# Altium PCB Updated_PCB1.pcbdoc
Units mm, origin at the board's own origin, x right, y up, seen from the top; angles counter-clockwise.
Board outline 114.3 x 96.01 mm, 2 copper layers (Top Layer, Bottom Layer); 136 components, 39 nets, 392 pads, 88 vias.
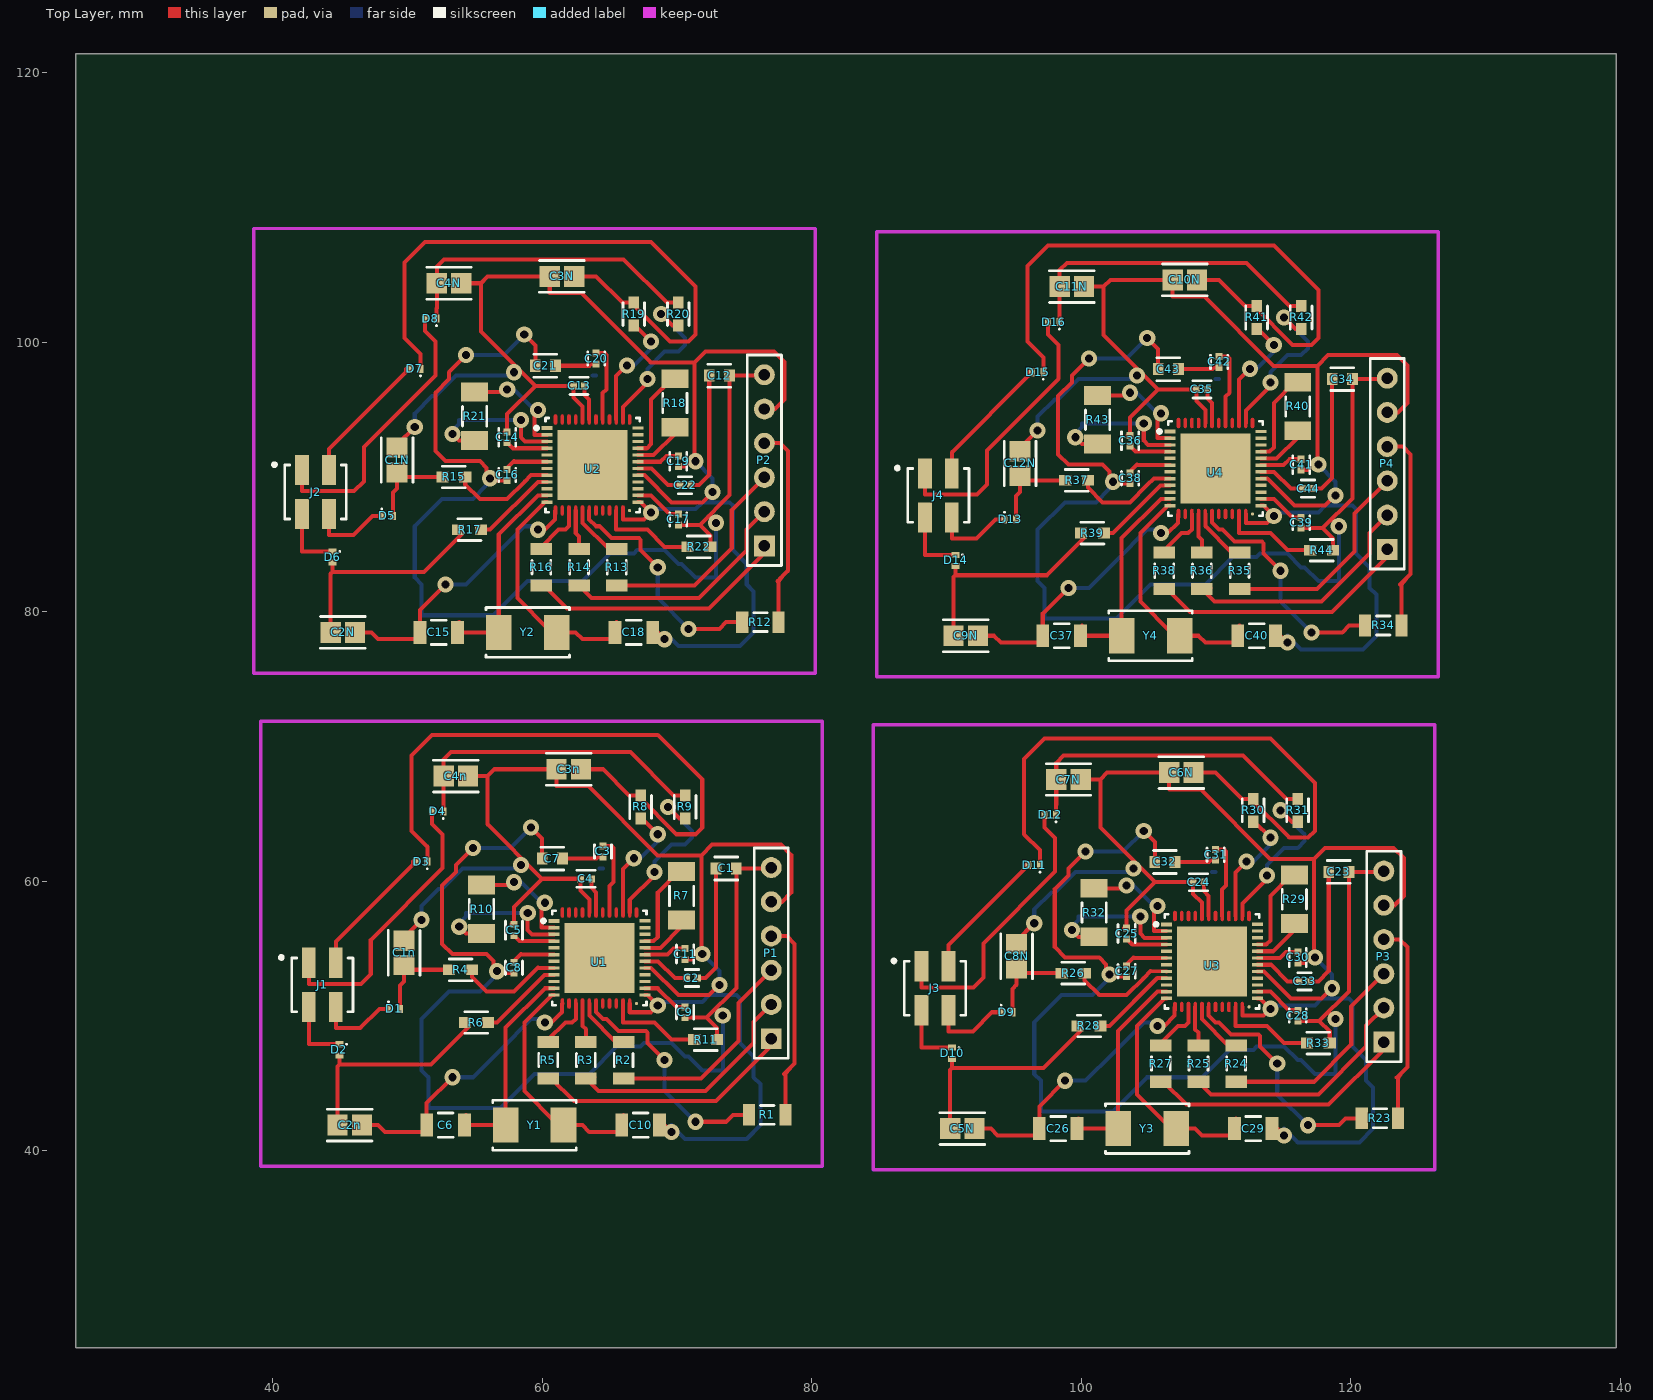
[diagram p0: Top Layer view]
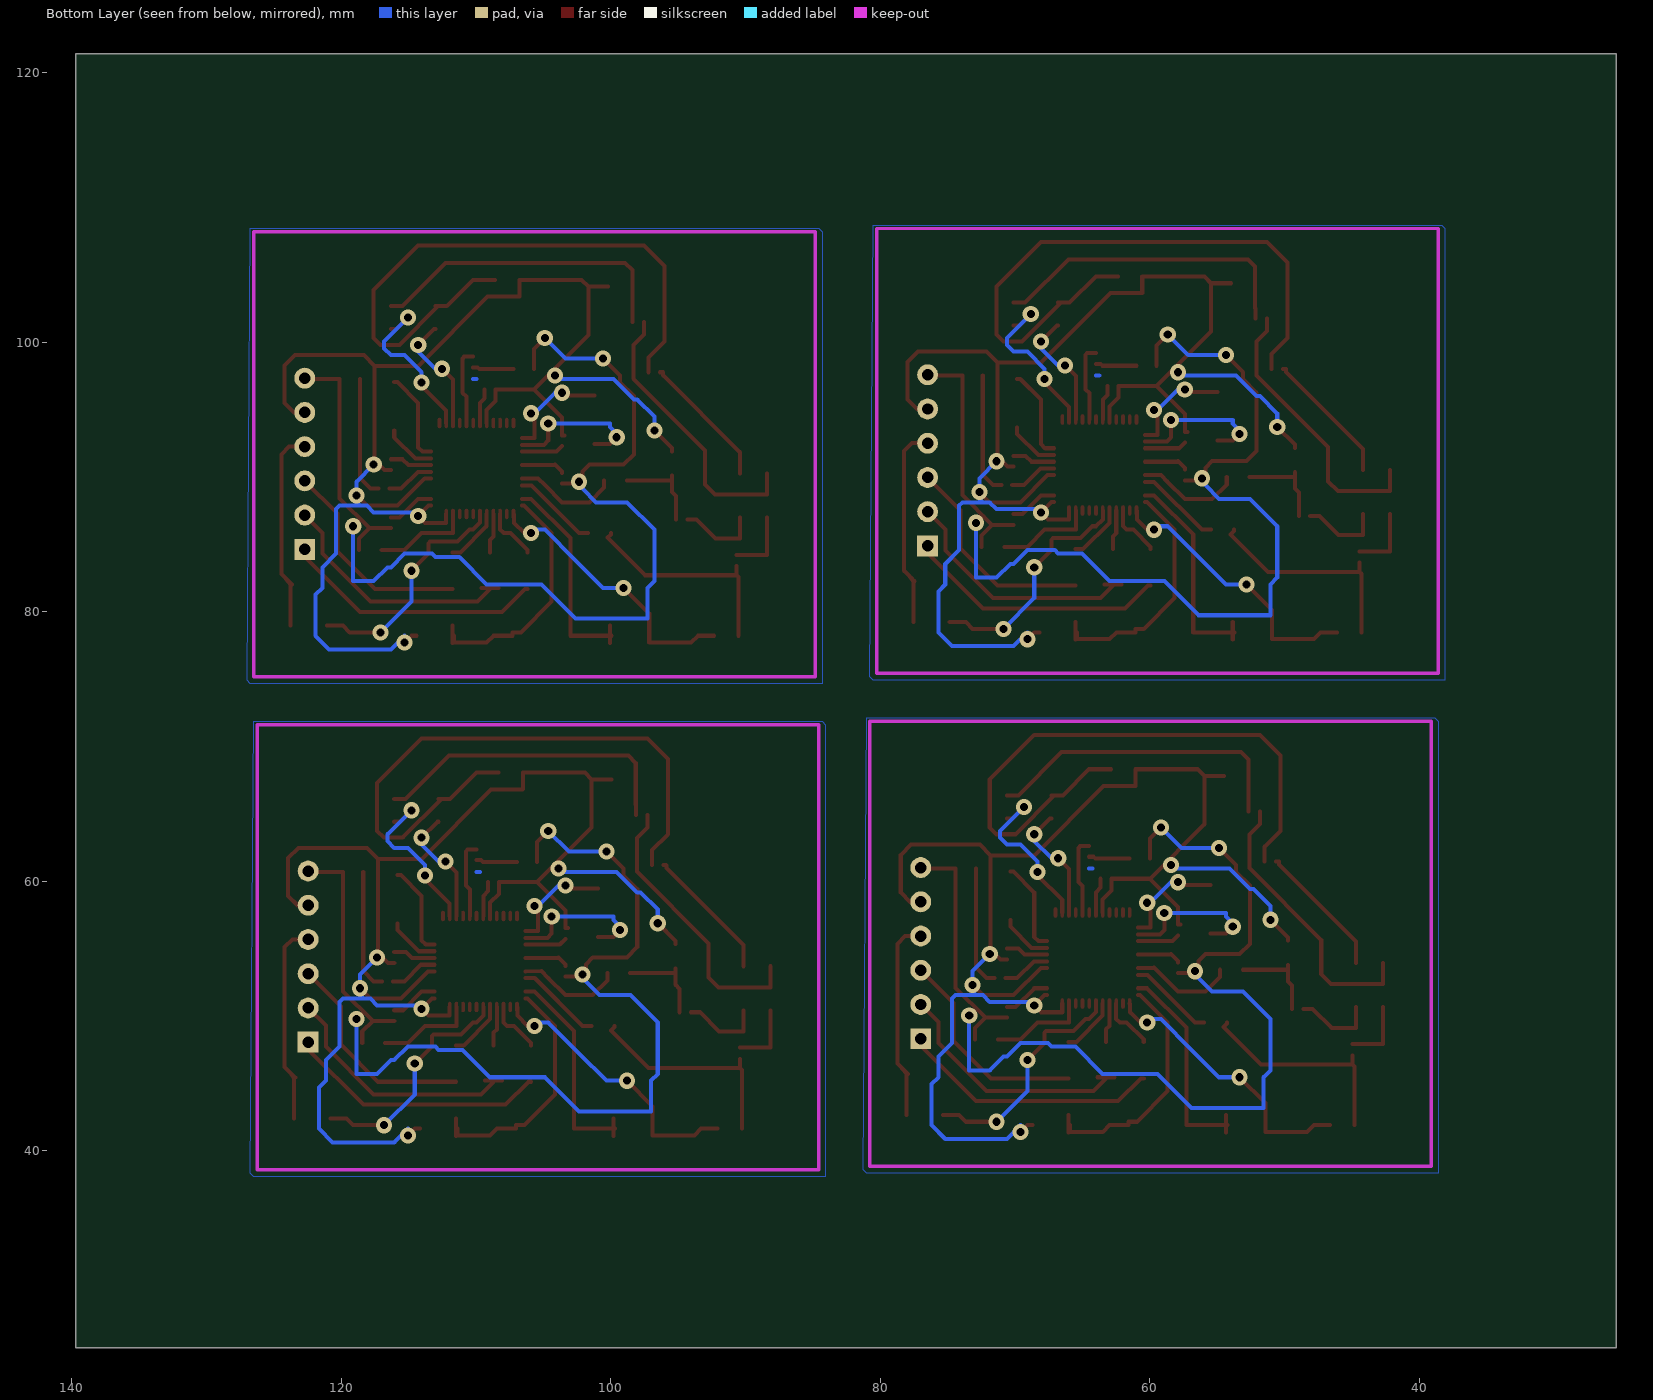
[diagram p1: Bottom Layer view, seen from below]

## Layer stack, top to bottom
Top Layer: signal copper (thickness not stored)
Dielectric: dielectric 0.32, FR-4, Dk 4.8
Bottom Layer: signal copper (thickness not stored)

## Board outline
139.7,25.4 25.4,25.4 25.4,121.412 139.7,121.412

## Components (designator, comment, footprint, x,y, rotation, side; value= is the part's Value field where it differs from the comment)
C1 "10uF" FP-CC0603-DB-MFG 73.66,60.96 r180 top
C1N "1nF" FP-0805-L_2_01_0_2-W_1_25-IPC_A 49.242,91.272 r90 top
C1n "1nF" FP-0805-L_2_01_0_2-W_1_25-IPC_A 49.75,54.696 r90 top
C2 ".1uF" FP-C0402-BB-MFG 71.12,52.832 r180 top
C2N "1nF" FP-0805-L_2_01_0_2-W_1_25-IPC_A 45.212,78.486 r0 top
C2n "1nF" FP-0805-L_2_01_0_2-W_1_25-IPC_A 45.72,41.91 r0 top
C3 ".1uF" FP-C0402-BB-MFG 64.516,62.23 r90 top
C3N "1nF" FP-0805-L_2_01_0_2-W_1_25-IPC_A 61.468,104.902 r180 top
C3n "1nF" FP-0805-L_2_01_0_2-W_1_25-IPC_A 61.976,68.326 r180 top
C4 "1uF" FP-C0402C105K8PACTU-MFG 63.246,60.198 r180 top
C4N "1nF" FP-0805-L_2_01_0_2-W_1_25-IPC_A 53.086,104.394 r0 top
C4n "1nF" FP-0805-L_2_01_0_2-W_1_25-IPC_A 53.594,67.818 r0 top
C5 "1uF" FP-C0402C105K8PACTU-MFG 57.912,56.388 r90 top
C5N "1nF" FP-0805-L_2_01_0_2-W_1_25-IPC_A 91.186,41.656 r0 top
C6 "22pF" FP-C1206C-EB-MFG 52.832,41.91 r180 top
C6N "1nF" FP-0805-L_2_01_0_2-W_1_25-IPC_A 107.442,68.072 r180 top
C7 "10uF" FP-CC0603-DB-MFG 60.75,61.696 r0 top
C7N "1nF" FP-0805-L_2_01_0_2-W_1_25-IPC_A 99.06,67.564 r0 top
C8 ".1uF" FP-C0402-BB-MFG 57.912,53.594 r90 top
C8N "1nF" FP-0805-L_2_01_0_2-W_1_25-IPC_A 95.216,54.442 r90 top
C9 ".1uF" FP-C0402-BB-MFG 70.612,50.292 r90 top
C9N "1nF" FP-0805-L_2_01_0_2-W_1_25-IPC_A 91.44,78.232 r0 top
C10 "22pF" FP-C1206C-EB-MFG 67.31,41.91 r0 top
C10N "1nF" FP-0805-L_2_01_0_2-W_1_25-IPC_A 107.696,104.648 r180 top
C11 "1uF" FP-C0402C105K8PACTU-MFG 70.612,54.61 r90 top
C11N "1nF" FP-0805-L_2_01_0_2-W_1_25-IPC_A 99.314,104.14 r0 top
C12 "10uF" FP-CC0603-DB-MFG 73.152,97.536 r180 top
C12N "1nF" FP-0805-L_2_01_0_2-W_1_25-IPC_A 95.47,91.018 r90 top
C13 "1uF" FP-C0402C105K8PACTU-MFG 62.738,96.774 r180 top
C14 "1uF" FP-C0402C105K8PACTU-MFG 57.404,92.964 r90 top
C15 "22pF" FP-C1206C-EB-MFG 52.324,78.486 r180 top
C16 ".1uF" FP-C0402-BB-MFG 57.404,90.17 r90 top
C17 ".1uF" FP-C0402-BB-MFG 70.104,86.868 r90 top
C18 "22pF" FP-C1206C-EB-MFG 66.802,78.486 r0 top
C19 "1uF" FP-C0402C105K8PACTU-MFG 70.104,91.186 r90 top
C20 ".1uF" FP-C0402-BB-MFG 64.008,98.806 r90 top
C21 "10uF" FP-CC0603-DB-MFG 60.242,98.272 r0 top
C22 ".1uF" FP-C0402-BB-MFG 70.612,89.408 r180 top
C23 "10uF" FP-CC0603-DB-MFG 119.126,60.706 r180 top
C24 "1uF" FP-C0402C105K8PACTU-MFG 108.712,59.944 r180 top
C25 "1uF" FP-C0402C105K8PACTU-MFG 103.378,56.134 r90 top
C26 "22pF" FP-C1206C-EB-MFG 98.298,41.656 r180 top
C27 ".1uF" FP-C0402-BB-MFG 103.378,53.34 r90 top
C28 ".1uF" FP-C0402-BB-MFG 116.078,50.038 r90 top
C29 "22pF" FP-C1206C-EB-MFG 112.776,41.656 r0 top
C30 "1uF" FP-C0402C105K8PACTU-MFG 116.078,54.356 r90 top
C31 ".1uF" FP-C0402-BB-MFG 109.982,61.976 r90 top
C32 "10uF" FP-CC0603-DB-MFG 106.216,61.442 r0 top
C33 ".1uF" FP-C0402-BB-MFG 116.586,52.578 r180 top
C34 "10uF" FP-CC0603-DB-MFG 119.38,97.282 r180 top
C35 "1uF" FP-C0402C105K8PACTU-MFG 108.966,96.52 r180 top
C36 "1uF" FP-C0402C105K8PACTU-MFG 103.632,92.71 r90 top
C37 "22pF" FP-C1206C-EB-MFG 98.552,78.232 r180 top
C38 ".1uF" FP-C0402-BB-MFG 103.632,89.916 r90 top
C39 ".1uF" FP-C0402-BB-MFG 116.332,86.614 r90 top
C40 "22pF" FP-C1206C-EB-MFG 113.03,78.232 r0 top
C41 "1uF" FP-C0402C105K8PACTU-MFG 116.332,90.932 r90 top
C42 ".1uF" FP-C0402-BB-MFG 110.236,98.552 r90 top
C43 "10uF" FP-CC0603-DB-MFG 106.47,98.018 r0 top
C44 ".1uF" FP-C0402-BB-MFG 116.84,89.154 r180 top
D1 "TVS Diode" ONSC-SOD-923-2-514AB-01_V 49.022,50.546 r0 top
D2 "TVS Diode" ONSC-SOD-923-2-514AB-01_V 44.958,47.498 r270 top
D3 "TVS Diode" ONSC-SOD-923-2-514AB-01_V 51.054,61.468 r180 top
D4 "TVS Diode" ONSC-SOD-923-2-514AB-01_V 52.25,65.196 r180 top
D5 "TVS Diode" ONSC-SOD-923-2-514AB-01_V 48.514,87.122 r0 top
D6 "TVS Diode" ONSC-SOD-923-2-514AB-01_V 44.45,84.074 r270 top
D7 "TVS Diode" ONSC-SOD-923-2-514AB-01_V 50.546,98.044 r180 top
D8 "TVS Diode" ONSC-SOD-923-2-514AB-01_V 51.742,101.772 r180 top
D9 "TVS Diode" ONSC-SOD-923-2-514AB-01_V 94.488,50.292 r0 top
D10 "TVS Diode" ONSC-SOD-923-2-514AB-01_V 90.424,47.244 r270 top
D11 "TVS Diode" ONSC-SOD-923-2-514AB-01_V 96.52,61.214 r180 top
D12 "TVS Diode" ONSC-SOD-923-2-514AB-01_V 97.716,64.942 r180 top
D13 "TVS Diode" ONSC-SOD-923-2-514AB-01_V 94.742,86.868 r0 top
D14 "TVS Diode" ONSC-SOD-923-2-514AB-01_V 90.678,83.82 r270 top
D15 "TVS Diode" ONSC-SOD-923-2-514AB-01_V 96.774,97.79 r180 top
D16 "TVS Diode" ONSC-SOD-923-2-514AB-01_V 97.97,101.518 r180 top
J1 "SQW-102-01-F-D-VS" SMTC-SQW-102-01-X-D-VS 43.688,52.324 r0 top
J2 "SQW-102-01-F-D-VS" SMTC-SQW-102-01-X-D-VS 43.18,88.9 r0 top
J3 "SQW-102-01-F-D-VS" SMTC-SQW-102-01-X-D-VS 89.154,52.07 r0 top
J4 "SQW-102-01-F-D-VS" SMTC-SQW-102-01-X-D-VS 89.408,88.646 r0 top
P1 "TSW-106-07-L-S" SMTC-TSW-106-07-X-S 77,48.326 r90 top
P2 "TSW-106-07-L-S" SMTC-TSW-106-07-X-S 76.492,84.902 r90 top
P3 "TSW-106-07-L-S" SMTC-TSW-106-07-X-S 122.466,48.072 r90 top
P4 "TSW-106-07-L-S" SMTC-TSW-106-07-X-S 122.72,84.648 r90 top
R1 "22Ω" RESC3216X60X45LL10T20 76.708,42.672 r0 top
R2 "22Ω" RESC3216X60X45LL10T20 66.04,46.736 r270 top
R3 "22Ω" RESC3216X60X45LL10T20 63.246,46.736 r270 top
R4 "10kΩ" FP-RT0603-MFG 53.949,53.446 r0 top
R5 "22Ω" RESC3216X60X45LL10T20 60.452,46.736 r270 top
R6 "10kΩ" FP-RT0603-MFG 55.118,49.53 r0 top
R7 "1kΩ" FP-RG3216-MFG 70.358,58.928 r270 top
R8 "10kΩ" FP-RT0603-MFG 67.31,65.532 r270 top
R9 "10kΩ" FP-RT0603-MFG 70.612,65.532 r270 top
R10 "1kΩ" FP-RG3216-MFG 55.5,57.946 r270 top
R11 "10kΩ" FP-RT0603-MFG 72.136,48.26 r0 top
R12 "22Ω" RESC3216X60X45LL10T20 76.2,79.248 r0 top
R13 "22Ω" RESC3216X60X45LL10T20 65.532,83.312 r270 top
R14 "22Ω" RESC3216X60X45LL10T20 62.738,83.312 r270 top
R15 "10kΩ" FP-RT0603-MFG 53.441,90.022 r0 top
R16 "22Ω" RESC3216X60X45LL10T20 59.944,83.312 r270 top
R17 "10kΩ" FP-RT0603-MFG 54.61,86.106 r0 top
R18 "1kΩ" FP-RG3216-MFG 69.85,95.504 r270 top
R19 "10kΩ" FP-RT0603-MFG 66.802,102.108 r270 top
R20 "10kΩ" FP-RT0603-MFG 70.104,102.108 r270 top
R21 "1kΩ" FP-RG3216-MFG 54.992,94.522 r270 top
R22 "10kΩ" FP-RT0603-MFG 71.628,84.836 r0 top
R23 "22Ω" RESC3216X60X45LL10T20 122.174,42.418 r0 top
R24 "22Ω" RESC3216X60X45LL10T20 111.506,46.482 r270 top
R25 "22Ω" RESC3216X60X45LL10T20 108.712,46.482 r270 top
R26 "10kΩ" FP-RT0603-MFG 99.415,53.192 r0 top
R27 "22Ω" RESC3216X60X45LL10T20 105.918,46.482 r270 top
R28 "10kΩ" FP-RT0603-MFG 100.584,49.276 r0 top
R29 "1kΩ" FP-RG3216-MFG 115.824,58.674 r270 top
R30 "10kΩ" FP-RT0603-MFG 112.776,65.278 r270 top
R31 "10kΩ" FP-RT0603-MFG 116.078,65.278 r270 top
R32 "1kΩ" FP-RG3216-MFG 100.966,57.692 r270 top
R33 "10kΩ" FP-RT0603-MFG 117.602,48.006 r0 top
R34 "22Ω" RESC3216X60X45LL10T20 122.428,78.994 r0 top
R35 "22Ω" RESC3216X60X45LL10T20 111.76,83.058 r270 top
R36 "22Ω" RESC3216X60X45LL10T20 108.966,83.058 r270 top
R37 "10kΩ" FP-RT0603-MFG 99.669,89.768 r0 top
R38 "22Ω" RESC3216X60X45LL10T20 106.172,83.058 r270 top
R39 "10kΩ" FP-RT0603-MFG 100.838,85.852 r0 top
R40 "1kΩ" FP-RG3216-MFG 116.078,95.25 r270 top
R41 "10kΩ" FP-RT0603-MFG 113.03,101.854 r270 top
R42 "10kΩ" FP-RT0603-MFG 116.332,101.854 r270 top
R43 "1kΩ" FP-RG3216-MFG 101.22,94.268 r270 top
R44 "10kΩ" FP-RT0603-MFG 117.856,84.582 r0 top
U1 "AD5941BCPZ-RL7" FP-CP-48-4-IPC_C 64.25,54.322 r0 top
U2 "AD5941BCPZ-RL7" FP-CP-48-4-IPC_C 63.742,90.898 r0 top
U3 "AD5941BCPZ-RL7" FP-CP-48-4-IPC_C 109.716,54.068 r0 top
U4 "AD5941BCPZ-RL7" FP-CP-48-4-IPC_C 109.97,90.644 r0 top
Y1 "Crystal 16MHz" FP-ABM7-MFG 59.436,41.91 r180 top
Y2 "Crystal 16MHz" FP-ABM7-MFG 58.928,78.486 r180 top
Y3 "Crystal 16MHz" FP-ABM7-MFG 104.902,41.656 r180 top
Y4 "Crystal 16MHz" FP-ABM7-MFG 105.156,78.232 r180 top

## Footprints (in the part's own frame and the unit in brackets; to place one, negate y for a bottom-side part, rotate by r counter-clockwise, add the part's x,y. Pads: shape width x height; smd on the part's side, far side on the other; paste and mask are expansions set on the pad)
FP-0805-L_2_01_0_2-W_1_25-IPC_A [mm]
  rect 1.505x1.556 smd paste+0 mask+0.051: 1(-0.906,0) 2(0.906,0)
  silkscreen extent -1.66,-1.18 1.66,1.18
FP-ABM7-MFG [mm]
  rect 1.9x2.6 smd paste+0 mask+0.051: 1(-2.15,0) 2(2.15,0)
  silkscreen extent -3.1,-1.85 3.1,1.85
FP-C0402-BB-MFG [mm]
  rect 0.52x0.52 smd paste+0 mask+0.051: 1(-0.4,0) 2(0.4,0)
  silkscreen extent -0.5,-0.64 0.5,0.64
FP-C0402C105K8PACTU-MFG [mm]
  rect 0.52x0.52 smd paste+0 mask+0.051: 1(-0.4,0) 2(0.4,0)
  silkscreen extent -0.67,-0.64 0.67,0.63
FP-C1206C-EB-MFG [mm]
  rect 0.95x1.7 smd paste+0 mask+0.051: 1(-1.4,0) 2(1.4,0)
  silkscreen extent -0.55,-0.9 0.55,0.9
FP-CC0603-DB-MFG [mm]
  rect 0.8x0.9 smd paste+0 mask+0.051: 1(-0.75,0) 2(0.75,0)
  silkscreen extent -0.85,-0.85 0.85,0.85
FP-CP-48-4-IPC_C [mm]
  rect 0.8x0.3 smd paste+0 mask+0.051: 1(-3.376,2.75)
  rect 0.8x0.25 smd paste+0 mask+0.051: 2(-3.376,2.25) 3(-3.376,1.75) 4(-3.376,1.25) 5(-3.376,0.75) 6(-3.376,0.25) 7(-3.376,-0.25) 8(-3.376,-0.75) 9(-3.376,-1.25) 10(-3.376,-1.75) 11(-3.376,-2.25) 12(-3.376,-2.75) 25(3.375,-2.75) 26(3.375,-2.25) 27(3.375,-1.75) 28(3.375,-1.25) 29(3.375,-0.75) 31(3.375,0.25) 32(3.375,0.75) 33(3.375,1.25) 34(3.375,1.75) 35(3.375,2.25) 36(3.375,2.75) ""(3.375,-0.25)
  round 0.239 smd paste+0 mask+0.051: 24(2.75,-3.375)
  rect 5.2x5.2 smd paste+0 mask+0.051: 49(0,0)
  Top Layer region: -0.75,3.756 -0.75,3.756 -0.75,3.756 -0.665,3.721 -0.63,3.636 -0.63,3.636 -0.63,3.115 -0.63,3.115 -0.665,3.03 -0.75,2.995 -0.75,2.995 -0.75,2.995 -0.75,2.995 -0.835,3.03 -0.87,3.115 -0.87,3.115 -0.87,3.636 -0.87,3.636 -0.835,3.721
  Top Layer region: 0.25,3.756 0.25,3.756 0.25,3.756 0.25,3.756 0.25,3.756 0.335,3.721 0.37,3.636 0.37,3.636 0.37,3.636 0.37,3.636 0.37,3.115 0.37,3.115 0.37,3.115 0.37,3.115 0.335,3.03 0.25,2.995 0.25,2.995 0.25,2.995 0.25,2.995 0.25,2.995 0.25,2.995 0.25,2.995 0.25,2.995 0.165,3.03 0.13,3.115 0.13,3.115 0.13,3.115 0.13,3.115 0.13,3.636 0.13,3.636 0.13,3.636 0.13,3.636 0.165,3.721
  Top Layer region: 2.25,-2.995 2.25,-2.995 2.25,-2.995 2.25,-2.995 2.25,-2.995 2.335,-3.03 2.37,-3.115 2.37,-3.115 2.37,-3.115 2.37,-3.115 2.37,-3.636 2.37,-3.636 2.37,-3.636 2.37,-3.636 2.335,-3.721 2.25,-3.756 2.25,-3.756 2.25,-3.756 2.25,-3.756 2.25,-3.756 2.25,-3.756 2.25,-3.756 2.25,-3.756 2.165,-3.721 2.13,-3.636 2.13,-3.636 2.13,-3.636 2.13,-3.636 2.13,-3.115 2.13,-3.115 2.13,-3.115 2.13,-3.115 2.165,-3.03
  Top Layer region: -2.75,-2.995 -2.75,-2.995 -2.75,-2.995 -2.75,-2.995 -2.75,-2.995 -2.665,-3.03 -2.63,-3.115 -2.63,-3.115 -2.63,-3.115 -2.63,-3.115 -2.63,-3.636 -2.63,-3.636 -2.63,-3.636 -2.63,-3.636 -2.665,-3.721 -2.75,-3.756 -2.75,-3.756 -2.75,-3.756 -2.75,-3.756 -2.75,-3.756 -2.75,-3.756 -2.75,-3.756 -2.75,-3.756 -2.835,-3.721 -2.87,-3.636 -2.87,-3.636 -2.87,-3.636 -2.87,-3.636 -2.87,-3.115 -2.87,-3.115 -2.87,-3.115 -2.87,-3.115 -2.835,-3.03
  Top Layer region: -1.25,-2.995 -1.25,-2.995 -1.25,-2.995 -1.25,-2.995 -1.25,-2.995 -1.165,-3.03 -1.13,-3.115 -1.13,-3.115 -1.13,-3.115 -1.13,-3.115 -1.13,-3.636 -1.13,-3.636 -1.13,-3.636 -1.13,-3.636 -1.165,-3.721 -1.25,-3.756 -1.25,-3.756 -1.25,-3.756 -1.25,-3.756 -1.25,-3.756 -1.25,-3.756 -1.25,-3.756 -1.25,-3.756 -1.335,-3.721 -1.37,-3.636 -1.37,-3.636 -1.37,-3.636 -1.37,-3.636 -1.37,-3.115 -1.37,-3.115 -1.37,-3.115 -1.37,-3.115 -1.335,-3.03
  Top Layer region: -0.75,-2.995 -0.75,-2.995 -0.75,-2.995 -0.75,-2.995 -0.75,-2.995 -0.665,-3.03 -0.63,-3.115 -0.63,-3.115 -0.63,-3.115 -0.63,-3.115 -0.63,-3.636 -0.63,-3.636 -0.63,-3.636 -0.63,-3.636 -0.665,-3.721 -0.75,-3.756 -0.75,-3.756 -0.75,-3.756 -0.75,-3.756 -0.75,-3.756 -0.75,-3.756 -0.75,-3.756 -0.75,-3.756 -0.835,-3.721 -0.87,-3.636 -0.87,-3.636 -0.87,-3.636 -0.87,-3.636 -0.87,-3.115 -0.87,-3.115 -0.87,-3.115 -0.87,-3.115 -0.835,-3.03
  Top Layer region: 1.75,-2.995 1.75,-2.995 1.75,-2.995 1.75,-2.995 1.75,-2.995 1.835,-3.03 1.87,-3.115 1.87,-3.115 1.87,-3.115 1.87,-3.115 1.87,-3.636 1.87,-3.636 1.87,-3.636 1.87,-3.636 1.835,-3.721 1.75,-3.756 1.75,-3.756 1.75,-3.756 1.75,-3.756 1.75,-3.756 1.75,-3.756 1.75,-3.756 1.75,-3.756 1.665,-3.721 1.63,-3.636 1.63,-3.636 1.63,-3.636 1.63,-3.636 1.63,-3.115 1.63,-3.115 1.63,-3.115 1.63,-3.115 1.665,-3.03
  Top Layer region: -0.25,-2.995 -0.25,-2.995 -0.25,-2.995 -0.25,-2.995 -0.25,-2.995 -0.165,-3.03 -0.13,-3.115 -0.13,-3.115 -0.13,-3.115 -0.13,-3.115 -0.13,-3.636 -0.13,-3.636 -0.13,-3.636 -0.13,-3.636 -0.165,-3.721 -0.25,-3.756 -0.25,-3.756 -0.25,-3.756 -0.25,-3.756 -0.25,-3.756 -0.25,-3.756 -0.25,-3.756 -0.25,-3.756 -0.335,-3.721 -0.37,-3.636 -0.37,-3.636 -0.37,-3.636 -0.37,-3.636 -0.37,-3.115 -0.37,-3.115 -0.37,-3.115 -0.37,-3.115 -0.335,-3.03
  Top Layer region: -0.25,3.756 -0.25,3.756 -0.25,3.756 -0.165,3.721 -0.13,3.636 -0.13,3.636 -0.13,3.115 -0.13,3.115 -0.165,3.03 -0.25,2.995 -0.25,2.995 -0.25,2.995 -0.25,2.995 -0.335,3.03 -0.37,3.115 -0.37,3.115 -0.37,3.636 -0.37,3.636 -0.335,3.721
  Top Layer region: -2.75,3.756 -2.75,3.756 -2.75,3.756 -2.665,3.721 -2.63,3.636 -2.63,3.636 -2.63,3.115 -2.63,3.115 -2.665,3.03 -2.75,2.995 -2.75,2.995 -2.75,2.995 -2.75,2.995 -2.835,3.03 -2.87,3.115 -2.87,3.115 -2.87,3.636 -2.87,3.636 -2.835,3.721
  Top Layer region: -2.25,3.756 -2.25,3.756 -2.25,3.756 -2.25,3.756 -2.25,3.756 -2.165,3.721 -2.13,3.636 -2.13,3.636 -2.13,3.636 -2.13,3.636 -2.13,3.115 -2.13,3.115 -2.13,3.115 -2.13,3.115 -2.165,3.03 -2.25,2.995 -2.25,2.995 -2.25,2.995 -2.25,2.995 -2.25,2.995 -2.25,2.995 -2.25,2.995 -2.25,2.995 -2.335,3.03 -2.37,3.115 -2.37,3.115 -2.37,3.115 -2.37,3.115 -2.37,3.636 -2.37,3.636 -2.37,3.636 -2.37,3.636 -2.335,3.721
  Top Layer region: -1.75,3.756 -1.75,3.756 -1.75,3.756 -1.665,3.721 -1.63,3.636 -1.63,3.636 -1.63,3.115 -1.63,3.115 -1.665,3.03 -1.75,2.995 -1.75,2.995 -1.75,2.995 -1.75,2.995 -1.835,3.03 -1.87,3.115 -1.87,3.115 -1.87,3.636 -1.87,3.636 -1.835,3.721
  Top Layer region: -1.25,3.756 -1.25,3.756 -1.25,3.756 -1.165,3.721 -1.13,3.636 -1.13,3.636 -1.13,3.115 -1.13,3.115 -1.165,3.03 -1.25,2.995 -1.25,2.995 -1.25,2.995 -1.25,2.995 -1.335,3.03 -1.37,3.115 -1.37,3.115 -1.37,3.636 -1.37,3.636 -1.335,3.721
  Top Layer region: 0.75,3.756 0.75,3.756 0.75,3.756 0.835,3.721 0.87,3.636 0.87,3.636 0.87,3.115 0.87,3.115 0.835,3.03 0.75,2.995 0.75,2.995 0.75,2.995 0.75,2.995 0.665,3.03 0.63,3.115 0.63,3.115 0.63,3.636 0.63,3.636 0.665,3.721
  Top Layer region: 1.25,3.756 1.25,3.756 1.25,3.756 1.25,3.756 1.25,3.756 1.335,3.721 1.37,3.636 1.37,3.636 1.37,3.636 1.37,3.636 1.37,3.115 1.37,3.115 1.37,3.115 1.37,3.115 1.335,3.03 1.25,2.995 1.25,2.995 1.25,2.995 1.25,2.995 1.25,2.995 1.25,2.995 1.25,2.995 1.25,2.995 1.165,3.03 1.13,3.115 1.13,3.115 1.13,3.115 1.13,3.115 1.13,3.636 1.13,3.636 1.13,3.636 1.13,3.636 1.165,3.721
  Top Layer region: 1.75,3.756 1.75,3.756 1.75,3.756 1.835,3.721 1.87,3.636 1.87,3.636 1.87,3.115 1.87,3.115 1.835,3.03 1.75,2.995 1.75,2.995 1.75,2.995 1.75,2.995 1.665,3.03 1.63,3.115 1.63,3.115 1.63,3.636 1.63,3.636 1.665,3.721
  Top Layer region: 2.25,3.756 2.25,3.756 2.25,3.756 2.25,3.756 2.25,3.756 2.335,3.721 2.37,3.636 2.37,3.636 2.37,3.636 2.37,3.636 2.37,3.115 2.37,3.115 2.37,3.115 2.37,3.115 2.335,3.03 2.25,2.995 2.25,2.995 2.25,2.995 2.25,2.995 2.25,2.995 2.25,2.995 2.25,2.995 2.25,2.995 2.165,3.03 2.13,3.115 2.13,3.115 2.13,3.115 2.13,3.115 2.13,3.636 2.13,3.636 2.13,3.636 2.13,3.636 2.165,3.721
  Top Layer region: 2.75,3.756 2.75,3.756 2.75,3.756 2.75,3.756 2.75,3.756 2.835,3.721 2.87,3.636 2.87,3.636 2.87,3.636 2.87,3.636 2.87,3.115 2.87,3.115 2.87,3.115 2.87,3.115 2.835,3.03 2.75,2.995 2.75,2.995 2.75,2.995 2.75,2.995 2.75,2.995 2.75,2.995 2.75,2.995 2.75,2.995 2.665,3.03 2.63,3.115 2.63,3.115 2.63,3.115 2.63,3.115 2.63,3.636 2.63,3.636 2.63,3.636 2.63,3.636 2.665,3.721
  Top Layer region: 1.25,-2.995 1.25,-2.995 1.25,-2.995 1.25,-2.995 1.25,-2.995 1.335,-3.03 1.37,-3.115 1.37,-3.115 1.37,-3.115 1.37,-3.115 1.37,-3.636 1.37,-3.636 1.37,-3.636 1.37,-3.636 1.335,-3.721 1.25,-3.756 1.25,-3.756 1.25,-3.756 1.25,-3.756 1.25,-3.756 1.25,-3.756 1.25,-3.756 1.25,-3.756 1.165,-3.721 1.13,-3.636 1.13,-3.636 1.13,-3.636 1.13,-3.636 1.13,-3.115 1.13,-3.115 1.13,-3.115 1.13,-3.115 1.165,-3.03
  Top Layer region: 0.75,-2.995 0.75,-2.995 0.75,-2.995 0.75,-2.995 0.75,-2.995 0.835,-3.03 0.87,-3.115 0.87,-3.115 0.87,-3.115 0.87,-3.115 0.87,-3.636 0.87,-3.636 0.87,-3.636 0.87,-3.636 0.835,-3.721 0.75,-3.756 0.75,-3.756 0.75,-3.756 0.75,-3.756 0.75,-3.756 0.75,-3.756 0.75,-3.756 0.75,-3.756 0.665,-3.721 0.63,-3.636 0.63,-3.636 0.63,-3.636 0.63,-3.636 0.63,-3.115 0.63,-3.115 0.63,-3.115 0.63,-3.115 0.665,-3.03
  Top Layer region: 0.25,-2.995 0.25,-2.995 0.25,-2.995 0.25,-2.995 0.25,-2.995 0.335,-3.03 0.37,-3.115 0.37,-3.115 0.37,-3.115 0.37,-3.115 0.37,-3.636 0.37,-3.636 0.37,-3.636 0.37,-3.636 0.335,-3.721 0.25,-3.756 0.25,-3.756 0.25,-3.756 0.25,-3.756 0.25,-3.756 0.25,-3.756 0.25,-3.756 0.25,-3.756 0.165,-3.721 0.13,-3.636 0.13,-3.636 0.13,-3.636 0.13,-3.636 0.13,-3.115 0.13,-3.115 0.13,-3.115 0.13,-3.115 0.165,-3.03
  Top Layer region: -1.75,-2.995 -1.75,-2.995 -1.75,-2.995 -1.75,-2.995 -1.75,-2.995 -1.665,-3.03 -1.63,-3.115 -1.63,-3.115 -1.63,-3.115 -1.63,-3.115 -1.63,-3.636 -1.63,-3.636 -1.63,-3.636 -1.63,-3.636 -1.665,-3.721 -1.75,-3.756 -1.75,-3.756 -1.75,-3.756 -1.75,-3.756 -1.75,-3.756 -1.75,-3.756 -1.75,-3.756 -1.75,-3.756 -1.835,-3.721 -1.87,-3.636 -1.87,-3.636 -1.87,-3.636 -1.87,-3.636 -1.87,-3.115 -1.87,-3.115 -1.87,-3.115 -1.87,-3.115 -1.835,-3.03
  Top Layer region: -2.25,-2.995 -2.25,-2.995 -2.25,-2.995 -2.25,-2.995 -2.25,-2.995 -2.165,-3.03 -2.13,-3.115 -2.13,-3.115 -2.13,-3.115 -2.13,-3.115 -2.13,-3.636 -2.13,-3.636 -2.13,-3.636 -2.13,-3.636 -2.165,-3.721 -2.25,-3.756 -2.25,-3.756 -2.25,-3.756 -2.25,-3.756 -2.25,-3.756 -2.25,-3.756 -2.25,-3.756 -2.25,-3.756 -2.335,-3.721 -2.37,-3.636 -2.37,-3.636 -2.37,-3.636 -2.37,-3.636 -2.37,-3.115 -2.37,-3.115 -2.37,-3.115 -2.37,-3.115 -2.335,-3.03
  silkscreen extent -4.28,-3.5 3.5,3.5
FP-RG3216-MFG [mm]
  rect 1.4x2 smd paste+0 mask+0.051: 1(-1.8,0) 2(1.8,0)
  silkscreen extent -0.72,-0.9 0.73,0.9
FP-RT0603-MFG [mm]
  rect 0.9x0.8 smd paste+0 mask+0.051: 1(-0.85,0) 2(0.85,0)
  silkscreen extent -0.85,-0.81 0.86,0.8
ONSC-SOD-923-2-514AB-01_V [mm]
  rect 0.45x0.6 smd paste+0 mask+0.051: 1(-0.42,0) 2(0.42,0)
  silkscreen extent -0.47,0.48 -0.37,0.58
RESC3216X60X45LL10T20 [mm]
  rect 0.9x1.6 smd paste+0 mask+0.051: 1(-1.35,0) 2(1.35,0)
  silkscreen extent -0.5,-0.7 0.5,0.7
SMTC-SQW-102-01-X-D-VS [mm]
  rect 1.016x2.24 smd paste+0 mask+0.051: 1(-1,1.635) 2(-1,-1.635) 3(1,1.635) 4(1,-1.635)
  silkscreen extent -3.17,-2 2.27,2.16
SMTC-TSW-106-07-X-S [mm]
  rect 1.55x1.55 hole 0.85 paste+0 mask+0.051: 1(0,0)
  round 1.55 hole 0.85 paste+0 mask+0.051: 2(2.54,0) 3(5.08,0) 4(7.62,0) 5(10.16,0) 6(12.7,0)
  silkscreen extent -1.46,-1.27 14.16,1.27

## Via types
v1: diameter 1.2, hole 0.6, Top Layer to Bottom Layer, tented both sides, 88 vias

## Nets (pads, with @x,y where several pads share a name; then routed paths per layer and width w, separated by ;. In a path a pad name is that pad's centre, name@x,y a point inside that pad or via, vN(x,y) a via of type N, cw(c..) or ccw(c..) an arc to the next point about the centre after c; other vN are vias at no path point)
3V3: C1.1 C7.1 C8.1 C9.1 C12.1 C16.1 C17.1 C21.1 C23.1 C27.1 C28.1 C32.1 C34.1 C38.1 C39.1 C43.1 P1.6 P2.6 P3.6 P4.6 R11.2 R22.2 R33.2 R44.2 | length 335.6
  Top Layer w0.3: v1(54.356,99.06) 53.086,97.79 53.086,97.282 52.07,96.266 52.07,91.948 52.832,91.186 55.372,91.186 55.88,90.678 55.88,90.17 v1(56.134,89.916) 56.242,89.916 56.388,89.77 C16.1 ; v1(54.864,62.484) 53.594,61.214 53.594,60.706 52.578,59.69 52.578,55.372 53.34,54.61 55.88,54.61 56.388,54.102 56.388,53.594 v1(56.642,53.34) 56.75,53.34 56.896,53.194 C8.1 ; v1(58.674,100.584) 59.492,99.766 C21.1 ; v1(59.182,64.008) 60,63.19 C7.1 ; C17.1@70.104,86.468 71.697,86.468 ; C9.1@70.612,49.892 72.205,49.892 ; 72.295,87.066 72.446,87.066 v1(72.898,86.614) ; R22.2 72.478,85.687 71.697,86.468 ; 72.803,50.49 72.954,50.49 v1(73.406,50.038) ; R11.2 72.986,49.111 72.205,49.892 ; P2.6 76.426,97.536 C12.1 73.902,88.673 71.697,86.468 ; P1.6 76.934,60.96 C1.1 74.41,52.097 72.205,49.892 ; v1(100.33,62.23) 99.06,60.96 99.06,60.452 98.044,59.436 98.044,55.118 98.806,54.356 101.346,54.356 101.854,53.848 101.854,53.34 v1(102.108,53.086) 102.216,53.086 102.362,52.94 C27.1 ; v1(100.584,98.806) 99.314,97.536 99.314,97.028 98.298,96.012 98.298,91.694 99.06,90.932 101.6,90.932 102.108,90.424 102.108,89.916 v1(102.362,89.662) 102.47,89.662 102.616,89.516 C38.1 ; v1(104.648,63.754) 105.466,62.936 C32.1 ; v1(104.902,100.33) 105.72,99.512 C43.1 ; C28.1@116.078,49.638 117.671,49.638 ; C39.1@116.332,86.214 117.925,86.214 ; 118.269,50.236 118.42,50.236 v1(118.872,49.784) ; R33.2 118.452,48.857 117.671,49.638 ; 118.523,86.812 118.674,86.812 v1(119.126,86.36) ; R44.2 118.706,85.433 117.925,86.214 ; P3.6 122.4,60.706 C23.1 119.876,51.843 117.671,49.638 ; P4.6 122.654,97.282 C34.1 120.13,88.419 117.925,86.214
  Bottom Layer w0.3: v1(54.356,99.06) 57.15,99.06 v1(58.674,100.584) ; v1(54.864,62.484) 57.658,62.484 v1(59.182,64.008) ; v1(56.134,89.916) 55.88,89.662 55.88,89.408 54.864,88.392 52.578,88.392 50.546,86.36 50.546,82.55 51.054,82.042 51.054,79.756 56.388,79.756 58.928,82.296 62.992,82.296 65.024,84.328 66.802,84.328 67.056,84.582 69.088,84.582 70.104,83.566 70.358,83.566 71.374,82.55 72.898,82.55 v1(72.898,86.614) ; v1(56.642,53.34) 56.388,53.086 56.388,52.832 55.372,51.816 53.086,51.816 51.054,49.784 51.054,45.974 51.562,45.466 51.562,43.18 56.896,43.18 59.436,45.72 63.5,45.72 65.532,47.752 67.31,47.752 67.564,48.006 69.596,48.006 70.612,46.99 70.866,46.99 71.882,45.974 73.406,45.974 v1(73.406,50.038) ; v1(100.33,62.23) 103.124,62.23 v1(104.648,63.754) ; v1(100.584,98.806) 103.378,98.806 v1(104.902,100.33) ; v1(102.108,53.086) 101.854,52.832 101.854,52.578 100.838,51.562 98.552,51.562 96.52,49.53 96.52,45.72 97.028,45.212 97.028,42.926 102.362,42.926 104.902,45.466 108.966,45.466 110.998,47.498 112.776,47.498 113.03,47.752 115.062,47.752 116.078,46.736 116.332,46.736 117.348,45.72 118.872,45.72 v1(118.872,49.784) ; v1(102.362,89.662) 102.108,89.408 102.108,89.154 101.092,88.138 98.806,88.138 96.774,86.106 96.774,82.296 97.282,81.788 97.282,79.502 102.616,79.502 105.156,82.042 109.22,82.042 111.252,84.074 113.03,84.074 113.284,84.328 115.316,84.328 116.332,83.312 116.586,83.312 117.602,82.296 119.126,82.296 v1(119.126,86.36)
GND: C1N.2 C1n.2 C2n.2 C2N.2 C3n.2 C3N.2 C4.2 C4N.2 C4n.2 C5.2 C5N.2 C6.2 C6N.2 C7N.2 C8N.2 C9N.2 C10.2 C10N.2 C11.1 C11N.2 C12N.2 C13.2 C14.2 C15.2 C18.2 C19.1 C24.2 C25.2 C26.2 C29.2 C30.1 C35.2 C36.2 C37.2 C40.2 C41.1 P1.5 P2.5 P3.5 P4.5 U1.25 U1.29 U2.25 U2.29 U3.25 U3.29 U4.25 U4.29 | length 538.7
  Top Layer w0.3: C2N.2 47.321,78.486 47.829,77.978 50.924,77.978 C15.2 50.924,80.134 v1(52.832,82.042) ; C2n.2 47.829,41.91 48.337,41.402 51.432,41.402 C6.2 51.432,43.558 v1(53.34,45.466) ; C1N.2 49.242,92.422 v1(50.546,93.726) ; C1n.2 49.75,55.846 v1(51.054,57.15) ; C4N.2 55.195,104.394 55.449,104.394 ; C4n.2 55.703,67.818 55.957,67.818 ; C14.2@57.201,93.364 C14.2 ; C14.2@57.292,93.364 C14.2 ; C14.2@57.351,93.364 C14.2 ; C5.2@57.709,56.788 C5.2 ; C5.2@57.8,56.788 C5.2 ; C5.2@57.859,56.788 C5.2 ; v1(57.912,97.79) 57.912,97.823 v1@58.179,98.09 ; v1(58.42,61.214) 58.42,61.247 v1@58.687,61.514 ; v1(59.69,86.106) 60.198,86.106 60.96,86.868 60.96,87.49 60.992,87.522 ; v1(60.198,49.53) 60.706,49.53 61.468,50.292 61.468,50.914 61.5,50.946 ; 62.992,94.273 62.992,95.25 62.338,95.904 C13.2 61.627,96.774 59.495,96.774 ; 63.5,57.697 63.5,58.674 62.846,59.328 C4.2 62.135,60.198 60.003,60.198 ; 65.992,87.522 65.992,86.868 67.564,86.868 v1(68.072,87.376) 67.3,88.148 U2.25 ; 66.5,50.946 66.5,50.292 68.072,50.292 v1(68.58,50.8) 67.808,51.572 U1.25 ; U2.29 67.586,90.148 69.596,88.138 71.882,88.138 v1(72.644,88.9) ; U1.29 68.094,53.572 70.104,51.562 72.39,51.562 v1(73.152,52.324) ; C18.2 68.58,78.486 v1(69.088,77.978) ; C10.2 69.088,41.91 v1(69.596,41.402) ; C19.1 70.574,90.786 71.306,91.518 71.306,98.51 ; C11.1 71.082,54.21 71.814,54.942 71.814,61.934 ; v1@70.973,91.185 v1(71.374,91.186) v1(71.374,91.186) ; v1@71.481,54.609 v1(71.882,54.61) v1(71.882,54.61) ; P2.5 77.282,95.062 77.978,95.758 77.978,98.552 77.216,99.314 72.11,99.314 71.306,98.51 ; P1.5 77.79,58.486 78.486,59.182 78.486,61.976 77.724,62.738 72.618,62.738 71.814,61.934 ; C5N.2 93.295,41.656 93.803,41.148 96.898,41.148 C26.2 96.898,43.304 v1(98.806,45.212) ; C9N.2 93.549,78.232 94.057,77.724 97.152,77.724 C37.2 97.152,79.88 v1(99.06,81.788) ; C8N.2 95.216,55.592 v1(96.52,56.896) ; C12N.2 95.47,92.168 v1(96.774,93.472) ; C7N.2 101.169,67.564 101.423,67.564 ; C11N.2 101.423,104.14 101.677,104.14 ; C25.2@103.175,56.534 C25.2 ; C25.2@103.266,56.534 C25.2 ; C25.2@103.325,56.534 C25.2 ; C36.2@103.429,93.11 C36.2 ; C36.2@103.52,93.11 C36.2 ; C36.2@103.579,93.11 C36.2 ; v1(103.886,60.96) 103.886,60.993 v1@104.153,61.26 ; v1(104.14,97.536) 104.14,97.569 v1@104.407,97.836 ; v1(105.664,49.276) 106.172,49.276 106.934,50.038 106.934,50.66 106.966,50.692 ; v1(105.918,85.852) 106.426,85.852 107.188,86.614 107.188,87.236 107.22,87.268 ; 108.966,57.443 108.966,58.42 108.312,59.074 C24.2 107.601,59.944 105.469,59.944 ; 109.22,94.019 109.22,94.996 108.566,95.65 C35.2 107.855,96.52 105.723,96.52 ; 111.966,50.692 111.966,50.038 113.538,50.038 v1(114.046,50.546) 113.274,51.318 U3.25 ; 112.22,87.268 112.22,86.614 113.792,86.614 v1(114.3,87.122) 113.528,87.894 U4.25 ; U3.29 113.56,53.318 115.57,51.308 117.856,51.308 v1(118.618,52.07) ; U4.29 113.814,89.894 115.824,87.884 118.11,87.884 v1(118.872,88.646) ; C29.2 114.554,41.656 v1(115.062,41.148) ; C40.2 114.808,78.232 v1(115.316,77.724) ; C30.1 116.548,53.956 117.28,54.688 117.28,61.68 ; C41.1 116.802,90.532 117.534,91.264 117.534,98.256 ; v1@116.947,54.355 v1(117.348,54.356) v1(117.348,54.356) ; v1@117.201,90.931 v1(117.602,90.932) v1(117.602,90.932) ; P3.5 123.256,58.232 123.952,58.928 123.952,61.722 123.19,62.484 118.084,62.484 117.28,61.68 ; P4.5 123.51,94.808 124.206,95.504 124.206,98.298 123.444,99.06 118.338,99.06 117.534,98.256 ; 55.449,104.394 55.957,104.902 C3N.2 60.562,103.673 60.58,103.655 62.916,103.655 68.061,98.51 71.306,98.51 ; 55.449,104.394 55.449,100.82 59.495,96.774 ; 55.957,67.818 56.465,68.326 C3n.2 61.07,67.097 61.088,67.079 63.424,67.079 68.569,61.934 71.814,61.934 ; 55.957,67.818 55.957,64.244 60.003,60.198 ; C14.2 57.404,94.683 59.495,96.774 ; C5.2 57.912,58.107 60.003,60.198 ; 101.423,67.564 101.931,68.072 C6N.2 106.536,66.843 106.554,66.825 108.89,66.825 114.035,61.68 117.28,61.68 ; 101.423,67.564 101.423,63.99 105.469,59.944 ; 101.677,104.14 102.185,104.648 C10N.2 106.79,103.419 106.808,103.401 109.144,103.401 114.289,98.256 117.534,98.256 ; 101.677,104.14 101.677,100.566 105.723,96.52 ; C25.2 103.378,57.853 105.469,59.944 ; C36.2 103.632,94.429 105.723,96.52
  Bottom Layer w0.3: v1(50.546,93.726) 50.546,94.742 51.816,96.012 52.07,96.012 53.594,97.536 57.658,97.536 v1(57.912,97.79) ; v1(51.054,57.15) 51.054,58.166 52.324,59.436 52.578,59.436 54.102,60.96 58.166,60.96 v1(58.42,61.214) ; v1(52.832,82.042) 54.356,82.042 56.388,84.074 58.674,86.36 59.436,86.36 v1(59.69,86.106) ; v1(53.34,45.466) 54.864,45.466 56.896,47.498 59.182,49.784 59.944,49.784 v1(60.198,49.53) ; 63.754,97.536 64.008,97.536 ; 64.262,60.96 64.516,60.96 ; v1(68.072,87.376) 68.326,87.63 71.374,87.63 71.882,88.138 73.914,88.138 74.168,87.884 74.168,84.582 75.184,83.566 75.184,82.042 75.692,81.534 75.692,78.486 74.676,77.47 70.104,77.47 69.088,78.486 v1(69.088,77.978) ; v1(68.58,50.8) 68.834,51.054 71.882,51.054 72.39,51.562 74.422,51.562 74.676,51.308 74.676,48.006 75.692,46.99 75.692,45.466 76.2,44.958 76.2,41.91 75.184,40.894 70.612,40.894 69.596,41.91 v1(69.596,41.402) ; v1(71.374,91.186) 72.644,89.916 v1(72.644,88.9) 72.644,88.392 72.39,88.138 ; v1(71.882,54.61) 73.152,53.34 v1(73.152,52.324) 73.152,51.816 72.898,51.562 ; v1(96.52,56.896) 96.52,57.912 97.79,59.182 98.044,59.182 99.568,60.706 103.632,60.706 v1(103.886,60.96) ; v1(96.774,93.472) 96.774,94.488 98.044,95.758 98.298,95.758 99.822,97.282 103.886,97.282 v1(104.14,97.536) ; v1(98.806,45.212) 100.33,45.212 102.362,47.244 104.648,49.53 105.41,49.53 v1(105.664,49.276) ; v1(99.06,81.788) 100.584,81.788 102.616,83.82 104.902,86.106 105.664,86.106 v1(105.918,85.852) ; 109.728,60.706 109.982,60.706 ; 109.982,97.282 110.236,97.282 ; v1(114.046,50.546) 114.3,50.8 117.348,50.8 117.856,51.308 119.888,51.308 120.142,51.054 120.142,47.752 121.158,46.736 121.158,45.212 121.666,44.704 121.666,41.656 120.65,40.64 116.078,40.64 115.062,41.656 v1(115.062,41.148) ; v1(114.3,87.122) 114.554,87.376 117.602,87.376 118.11,87.884 120.142,87.884 120.396,87.63 120.396,84.328 121.412,83.312 121.412,81.788 121.92,81.28 121.92,78.232 120.904,77.216 116.332,77.216 115.316,78.232 v1(115.316,77.724) ; v1(117.348,54.356) 118.618,53.086 v1(118.618,52.07) 118.618,51.562 118.364,51.308 ; v1(117.602,90.932) 118.872,89.662 v1(118.872,88.646) 118.872,88.138 118.618,87.884
NETC1_2: C1.2 C2.1 C12.2 C22.1 C23.2 C33.1 C34.2 C44.1 | length 36.3
  Top Layer w0.3: C22.1@71.012,89.408 71.628,89.408 72.402,90.182 C12.2 ; C2.1@71.52,52.832 72.136,52.832 72.91,53.606 C1.2 ; C33.1@116.986,52.578 117.602,52.578 118.376,53.352 C23.2 ; C44.1@117.24,89.154 117.856,89.154 118.63,89.928 C34.2
NETC1N_1: C1N.1 C1n.1 C8N.1 C12N.1 D1.2 D5.2 D9.2 D13.2 R4.1 R15.1 R26.1 R37.1 | length 26.9
  Top Layer w0.3: D5.2 48.934,88.855 49.242,89.163 C1N.1@49.242,90.022 ; C1N.1 C1N.1@49.242,90.022 ; D1.2 49.442,52.279 49.75,52.587 C1n.1@49.75,53.446 ; C1n.1 C1n.1@49.75,53.446 ; R15.1 C1N.1@49.242,90.022 ; R4.1 C1n.1@49.75,53.446 ; D9.2 94.908,52.025 95.216,52.333 C8N.1@95.216,53.192 ; D13.2 95.162,88.601 95.47,88.909 C12N.1@95.47,89.768 ; C8N.1 C8N.1@95.216,53.192 ; C12N.1 C12N.1@95.47,89.768 ; R26.1 C8N.1@95.216,53.192 ; R37.1 C12N.1@95.47,89.768
NETC2_2: C2.2 C22.2 C33.2 C44.2 U1. U2. U3. U4. | length 14.4
  Top Layer w0.3: U2. 68.102,90.648 69.342,89.408 C22.2 ; U1. 68.61,54.072 69.85,52.832 C2.2 ; U3. 114.076,53.818 115.316,52.578 C33.2 ; U4. 114.33,90.394 115.57,89.154 C44.2
NETC2N_1: C2n.1 C2N.1 C5N.1 C9N.1 D2.2 D6.2 D10.2 D14.2 R6.1 R17.1 R28.1 R39.1 | length 65.6
  Top Layer w0.3: C2N.1 44.306,82.834 44.45,82.978 ; D6.2 44.45,82.978 ; C2n.1 44.814,46.258 44.958,46.402 ; D2.2 44.958,46.402 ; R17.1 53.76,86.017 54.014,85.763 51.229,82.978 44.45,82.978 ; R6.1 54.268,49.441 54.522,49.187 51.737,46.402 44.958,46.402 ; C5N.1 90.28,46.004 90.424,46.148 ; D10.2 90.424,46.148 ; C9N.1 90.534,82.58 90.678,82.724 ; D14.2 90.678,82.724 ; R28.1 99.734,49.187 99.988,48.933 97.203,46.148 90.424,46.148 ; R39.1 99.988,85.763 100.242,85.509 97.457,82.724 90.678,82.724
NETC3_1: C3.1 C7.2 C20.1 C21.2 C31.1 C32.2 C42.1 C43.2 | length 12.3
  Top Layer w0.3: C21.2 61.843,98.272 63.526,98.272 63.66,98.406 C20.1@64.008,98.406 ; C7.2 62.351,61.696 64.034,61.696 64.168,61.83 C3.1@64.516,61.83 ; C32.2 107.817,61.442 109.5,61.442 109.634,61.576 C31.1@109.982,61.576 ; C43.2 108.071,98.018 109.754,98.018 109.888,98.152 C42.1@110.236,98.152
NETC3_2: C3.2 C20.2 C31.2 C42.2 | length 22.9
  Top Layer w0.3: C20.2 64.662,99.206 64.77,99.06 64.77,96.52 64.492,96.242 64.492,94.273 ; C3.2 65.17,62.63 65.278,62.484 65.278,59.944 65,59.666 65,57.697 ; C31.2 110.636,62.376 110.744,62.23 110.744,59.69 110.466,59.412 110.466,57.443 ; C42.2 110.89,98.952 110.998,98.806 110.998,96.266 110.72,95.988 110.72,94.019
NETC3N_1: C3n.1 C3N.1 C6N.1 C10N.1 D3.1 D7.1 D11.1 D15.1 R8.1 R19.1 R30.1 R41.1 | length 187.9
  Top Layer w0.3: D7.1 50.966,99.148 49.784,100.33 49.784,105.918 51.308,107.442 68.072,107.442 71.374,104.14 71.374,100.584 70.866,100.076 69.473,100.076 66.591,102.958 R19.1@66.555,102.958 ; D3.1 51.474,62.572 50.292,63.754 50.292,69.342 51.816,70.866 68.58,70.866 71.882,67.564 71.882,64.008 71.374,63.5 69.981,63.5 67.099,66.382 R8.1@67.063,66.382 ; C3N.1 64.007,104.902 65.951,102.958 66.377,102.958 R19.1@66.555,102.958 ; C3n.1 64.515,68.326 66.459,66.382 66.885,66.382 R8.1@67.063,66.382 ; R19.1 R19.1@66.555,102.958 ; R8.1 R8.1@67.063,66.382 ; D11.1 96.94,62.318 95.758,63.5 95.758,69.088 97.282,70.612 114.046,70.612 117.348,67.31 117.348,63.754 116.84,63.246 115.447,63.246 112.565,66.128 R30.1@112.529,66.128 ; D15.1 97.194,98.894 96.012,100.076 96.012,105.664 97.536,107.188 114.3,107.188 117.602,103.886 117.602,100.33 117.094,99.822 115.701,99.822 112.819,102.704 R41.1@112.783,102.704 ; C6N.1 109.981,68.072 111.925,66.128 112.351,66.128 R30.1@112.529,66.128 ; C10N.1 110.235,104.648 112.179,102.704 112.605,102.704 R41.1@112.783,102.704 ; R30.1 R30.1@112.529,66.128 ; R41.1 R41.1@112.783,102.704
NETC4_1: C4.1 C13.1 C24.1 C35.1 | length 10.6
  Top Layer w0.3: C13.1 63.138,96.112 63.492,95.758 63.492,94.273 ; C4.1 63.646,59.536 64,59.182 64,57.697 ; C24.1 109.112,59.282 109.466,58.928 109.466,57.443 ; C35.1 109.366,95.858 109.72,95.504 109.72,94.019
NETC4N_1: C4N.1 C4n.1 C7N.1 C11N.1 D4.1 D8.1 D12.1 D16.1 R9.1 R20.1 R31.1 R42.1 | length 93.3
  Top Layer w0.3: D8.1 52.162,102.523 52.18,102.541 C4N.1 52.18,105.623 52.724,106.167 66.045,106.167 69.253,102.958 R20.1 ; D4.1 52.67,65.947 52.688,65.965 C4n.1 52.688,69.047 53.232,69.591 66.553,69.591 69.761,66.382 R9.1 ; D12.1 98.136,65.693 98.154,65.711 C7N.1 98.154,68.793 98.698,69.337 112.019,69.337 115.227,66.128 R31.1 ; D16.1 98.39,102.269 98.408,102.287 C11N.1 98.408,105.369 98.952,105.913 112.273,105.913 115.481,102.704 R42.1
NETC5_1: C5.1 C14.1 C25.1 C36.1 U1.4 U2.4 U3.4 U4.4 | length 12.5
  Top Layer w0.3: C14.1@57.404,92.564 57.82,92.148 U2.4 ; C5.1@57.912,55.988 58.328,55.572 U1.4 ; C25.1@103.378,55.734 103.794,55.318 U3.4 ; C36.1@103.632,92.31 104.048,91.894 U4.4
NETC6_1: C6.1 C15.1 C26.1 C37.1 U1.11 U2.11 U3.11 U4.11 Y1.2 Y2.2 Y3.2 Y4.2 | length 65.6
  Top Layer w0.3: C15.1 55.378,78.486 56.547,78.486 56.616,78.486 56.697,78.486 Y2.2 56.778,85.734 59.692,88.648 U2.11 ; C15.1@53.848,77.948 53.848,78.038 C15.1@53.848,79.248 ; C6.1 55.886,41.91 57.055,41.91 57.124,41.91 57.205,41.91 Y1.2 57.286,49.158 60.2,52.072 U1.11 ; C6.1@54.356,41.372 54.356,41.462 C6.1@54.356,42.672 ; C26.1 101.352,41.656 102.521,41.656 102.59,41.656 102.671,41.656 Y3.2 102.752,48.904 105.666,51.818 U3.11 ; C26.1@99.822,41.118 99.822,41.208 C26.1@99.822,42.418 ; C37.1 101.606,78.232 102.775,78.232 102.844,78.232 102.925,78.232 Y4.2 103.006,85.48 105.92,88.394 U4.11 ; C37.1@100.076,77.694 100.076,77.784 C37.1@100.076,78.994
NETC8_2: C8.2 C16.2 C27.2 C38.2 U1.6 U2.6 U3.6 U4.6 | length 13.2
  Top Layer w0.3: C16.2 57.404,90.678 57.912,91.186 57.95,91.148 U2.6 ; C8.2 57.912,54.102 58.42,54.61 58.458,54.572 U1.6 ; C27.2 103.378,53.848 103.886,54.356 103.924,54.318 U3.6 ; C38.2 103.632,90.424 104.14,90.932 104.178,90.894 U4.6
NETC9_2: C9.2 C17.2 C28.2 C39.2 U1.26 U2.26 U3.26 U4.26 | length 14.2
  Top Layer w0.3: U2.26 68.07,88.648 69.45,87.268 C17.2 ; U1.26 68.578,52.072 69.958,50.692 C9.2 ; U3.26 114.044,51.818 115.424,50.438 C28.2 ; U4.26 114.298,88.394 115.678,87.014 C39.2
NETC10_1: C10.1 C18.1 C29.1 C40.1 U1.12 U2.12 U3.12 U4.12 Y1.1 Y2.1 Y3.1 Y4.1 | length 74.3
  Top Layer w0.3: U2.12 60.208,88.148 58.166,86.106 58.166,81.28 58.166,81.026 60.452,78.74 61.078,78.74 Y2.1 61.432,78.486 62.479,78.486 62.987,77.978 65.402,77.978 C18.1 ; U1.12 60.716,51.572 58.674,49.53 58.674,44.704 58.674,44.45 60.96,42.164 61.586,42.164 Y1.1 61.94,41.91 62.987,41.91 63.495,41.402 65.91,41.402 C10.1 ; C18.1@65.532,77.948 65.532,78.036 C18.1@65.532,79.248 ; C10.1@66.04,41.372 66.04,41.46 C10.1@66.04,42.672 ; U3.12 106.182,51.318 104.14,49.276 104.14,44.45 104.14,44.196 106.426,41.91 107.052,41.91 Y3.1 107.406,41.656 108.453,41.656 108.961,41.148 111.376,41.148 C29.1 ; U4.12 106.436,87.894 104.394,85.852 104.394,81.026 104.394,80.772 106.68,78.486 107.306,78.486 Y4.1 107.66,78.232 108.707,78.232 109.215,77.724 111.63,77.724 C40.1 ; C29.1@111.506,41.118 111.506,41.206 C29.1@111.506,42.418 ; C40.1@111.76,77.694 111.76,77.782 C40.1@111.76,78.994
NETC11_2: C11.2 C19.2 C30.2 C41.2 U1.31 U2.31 U3.31 U4.31 | length 12.7
  Top Layer w0.3: U2.31 68.796,91.148 69.234,91.586 C19.2 ; U1.31 69.304,54.572 69.742,55.01 C11.2 ; U3.31 114.77,54.318 115.208,54.756 C30.2 ; U4.31 115.024,90.894 115.462,91.332 C41.2
NETD1_1: D1.1 D5.1 D9.1 D13.1 J1.4 J2.4 J3.4 J4.4 | length 24.3
  Top Layer w0.3: J2.4 44.18,85.695 45.991,85.695 47.418,87.122 D5.1 ; J1.4 44.688,49.119 46.499,49.119 47.926,50.546 D1.1 ; J3.4 90.154,48.865 91.965,48.865 93.392,50.292 D9.1 ; J4.4 90.408,85.441 92.219,85.441 93.646,86.868 D13.1
NETD2_1: D2.1 D6.1 D10.1 D14.1 J1.2 J2.2 J3.2 J4.2 | length 20.2
  Top Layer w0.3: J2.2 42.18,85.695 42.18,84.494 D6.1 ; J1.2 42.688,49.119 42.688,47.918 D2.1 ; J3.2 88.154,48.865 88.154,47.664 D10.1 ; J4.2 88.408,85.441 88.408,84.24 D14.1
NETD3_2: D3.2 D7.2 D11.2 D15.2 J1.3 J2.3 J3.3 J4.3 | length 40.4
  Top Layer w0.3: J2.3 44.18,92.105 49.896,97.822 49.896,98.022 49.918,98.044 D7.2 ; J1.3 44.688,55.529 50.404,61.246 50.404,61.446 50.426,61.468 D3.2 ; J3.3 90.154,55.275 95.87,60.992 95.87,61.192 95.892,61.214 D11.2 ; J4.3 90.408,91.851 96.124,97.568 96.124,97.768 96.146,97.79 D15.2
NETD4_2: D4.2 D8.2 D12.2 D16.2 J1.1 J2.1 J3.1 J4.1 | length 84.3
  Top Layer w0.3: J2.1 42.18,88.965 46.039,88.965 46.771,89.697 46.771,92.237 52.094,97.56 52.094,100.068 51.322,100.84 D8.2 ; J1.1 42.688,52.389 46.547,52.389 47.279,53.121 47.279,55.661 52.602,60.984 52.602,63.492 51.83,64.264 D4.2 ; J3.1 88.154,52.135 92.013,52.135 92.745,52.867 92.745,55.407 98.068,60.73 98.068,63.238 97.296,64.01 D12.2 ; J4.1 88.408,88.711 92.267,88.711 92.999,89.443 92.999,91.983 98.322,97.306 98.322,99.814 97.55,100.586 D16.2
NETP1_1: P1.1 P2.1 P3.1 P4.1 R5.2 R16.2 R27.2 R38.2 | length 77.9
  Top Layer w0.3: R16.2@59.944,81.962 60.151,81.962 61.849,80.264 72.39,80.264 76.492,84.366 P2.1 ; R5.2@60.452,45.386 60.659,45.386 62.357,43.688 72.898,43.688 77,47.79 P1.1 ; R27.2@105.918,45.132 106.125,45.132 107.823,43.434 118.364,43.434 122.466,47.536 P3.1 ; R38.2@106.172,81.708 106.379,81.708 108.077,80.01 118.618,80.01 122.72,84.112 P4.1
NETP1_2: P1.2 P2.2 P3.2 P4.2 R3.2 R14.2 R25.2 R36.2 | length 75.8
  Top Layer w0.3: R14.2@62.113,82.042 R14.2@63.363,82.042 ; R3.2@62.621,45.466 R3.2@63.871,45.466 ; R14.2@62.738,81.962 63.674,81.026 71.628,81.026 75.179,84.577 75.179,86.129 P2.2 ; R3.2@63.246,45.386 64.182,44.45 72.136,44.45 75.687,48.001 75.687,49.553 P1.2 ; R25.2@108.087,45.212 R25.2@109.337,45.212 ; R36.2@108.341,81.788 R36.2@109.591,81.788 ; R25.2@108.712,45.132 109.648,44.196 117.602,44.196 121.153,47.747 121.153,49.299 P3.2 ; R36.2@108.966,81.708 109.902,80.772 117.856,80.772 121.407,84.323 121.407,85.875 P4.2
NETP1_3: P1.3 P2.3 P3.3 P4.3 R2.2 R13.2 R24.2 R35.2 | length 63.7
  Top Layer w0.3: R13.2@65.532,81.962 71.294,81.962 74.072,84.74 74.072,87.562 P2.3 ; R2.2@66.04,45.386 71.802,45.386 74.58,48.164 74.58,50.986 P1.3 ; R24.2@111.506,45.132 117.268,45.132 120.046,47.91 120.046,50.732 P3.3 ; R35.2@111.76,81.708 117.522,81.708 120.3,84.486 120.3,87.308 P4.3
NETP1_4: P1.4 P2.4 P3.4 P4.4 R1.2 R12.2 R23.2 R34.2 | length 63.7
  Top Layer w0.3: P2.4 77.658,92.522 78.232,91.948 78.232,83.058 77.451,82.277 77.724,82.55 ; P1.4 78.166,55.946 78.74,55.372 78.74,46.482 77.959,45.701 78.232,45.974 ; R12.2@77.55,79.248 77.55,82.277 77.872,82.702 ; R1.2@78.058,42.672 78.058,45.701 78.38,46.126 ; P3.4 123.632,55.692 124.206,55.118 124.206,46.228 123.425,45.447 123.698,45.72 ; P4.4 123.886,92.268 124.46,91.694 124.46,82.804 123.679,82.023 123.952,82.296 ; R23.2@123.524,42.418 123.524,45.447 123.846,45.872 ; R34.2@123.778,78.994 123.778,82.023 124.1,82.448
NETR1_1: R1.1 R12.1 R23.1 R34.1 | length 69.5
  Top Layer w0.3: 63.492,87.522 63.492,86.876 64.008,86.36 64.262,86.36 65.151,85.471 67.183,85.471 67.31,85.344 67.31,84.582 v1(68.58,83.312) ; 64,50.946 64,50.3 64.516,49.784 64.77,49.784 65.659,48.895 67.691,48.895 67.818,48.768 67.818,48.006 v1(69.088,46.736) ; v1(70.866,78.74) 73.152,78.74 73.66,79.248 R12.1 ; v1(71.374,42.164) 73.66,42.164 74.168,42.672 R1.1 ; 109.466,50.692 109.466,50.046 109.982,49.53 110.236,49.53 111.125,48.641 113.157,48.641 113.284,48.514 113.284,47.752 v1(114.554,46.482) ; 109.72,87.268 109.72,86.622 110.236,86.106 110.49,86.106 111.379,85.217 113.411,85.217 113.538,85.09 113.538,84.328 v1(114.808,83.058) ; v1(116.84,41.91) 119.126,41.91 119.634,42.418 R23.1 ; v1(117.094,78.486) 119.38,78.486 119.888,78.994 R34.1
  Bottom Layer w0.3: v1(68.58,83.312) 68.58,81.026 v1(70.866,78.74) ; v1(69.088,46.736) 69.088,44.45 v1(71.374,42.164) ; v1(114.554,46.482) 114.554,44.196 v1(116.84,41.91) ; v1(114.808,83.058) 114.808,80.772 v1(117.094,78.486)
NETR2_1: R2.1 R13.1 R24.1 R35.1 | length 17
  Top Layer w0.3: 62.992,87.522 62.992,86.614 64.944,84.662 R13.1 ; 63.5,50.946 63.5,50.038 65.452,48.086 R2.1 ; 108.966,50.692 108.966,49.784 110.918,47.832 R24.1 ; 109.22,87.268 109.22,86.36 111.172,84.408 R35.1
NETR3_1: R3.1 R14.1 R25.1 R36.1 | length 11.8
  Top Layer w0.3: 62.492,87.522 62.492,85.852 62.738,85.606 R14.1 ; 63,50.946 63,49.276 63.246,49.03 R3.1 ; 108.466,50.692 108.466,49.022 108.712,48.776 R25.1 ; 108.72,87.268 108.72,85.598 108.966,85.352 R36.1
NETR4_2: R4.2 R15.2 R26.2 R37.2 U1.8 U2.8 U3.8 U4.8 | length 31.2
  Top Layer w0.3: R15.2 54.291,89.473 55.372,88.392 57.404,88.392 58.674,89.662 59.182,90.17 U2.8 ; R4.2 54.799,52.897 55.88,51.816 57.912,51.816 59.182,53.086 59.69,53.594 U1.8 ; R26.2 100.265,52.643 101.346,51.562 103.378,51.562 104.648,52.832 105.156,53.34 U3.8 ; R37.2 100.519,89.219 101.6,88.138 103.632,88.138 104.902,89.408 105.41,89.916 U4.8
NETR5_1: R5.1 R16.1 R27.1 R38.1 | length 16
  Top Layer w0.3: R16.1 59.944,84.836 61.214,86.106 61.722,86.106 61.992,86.376 61.992,87.522 ; R5.1 60.452,48.26 61.722,49.53 62.23,49.53 62.5,49.8 62.5,50.946 ; R27.1 105.918,48.006 107.188,49.276 107.696,49.276 107.966,49.546 107.966,50.692 ; R38.1 106.172,84.582 107.442,85.852 107.95,85.852 108.22,86.122 108.22,87.268
NETR7_1: R7.1 R18.1 R29.1 R40.1 U1.33 U2.33 U3.33 U4.33 | length 27.2
  Top Layer w0.3: U2.33 67.764,92.148 68.072,92.456 68.072,95.758 69.618,97.304 R18.1 ; U1.33 68.272,55.572 68.58,55.88 68.58,59.182 70.126,60.728 R7.1 ; U3.33 113.738,55.318 114.046,55.626 114.046,58.928 115.592,60.474 R29.1 ; U4.33 113.992,91.894 114.3,92.202 114.3,95.504 115.846,97.05 R40.1
NETR7_2: R7.2 R18.2 R29.2 R40.2 U1.32 U2.32 U3.32 U4.32 | length 15.5
  Top Layer w0.3: U2.32 68.28,91.648 69.85,93.218 R18.2 ; U1.32 68.788,55.072 70.358,56.642 R7.2 ; U3.32 114.254,54.818 115.824,56.388 R29.2 ; U4.32 114.508,91.394 116.078,92.964 R40.2
NETR8_2: R8.2 R19.2 R30.2 R41.2 | length 35.7
  Top Layer w0.3: 65.492,94.273 65.492,97.496 v1(66.294,98.298) ; 66,57.697 66,60.92 v1(66.802,61.722) ; R19.2 66.89,101.258 v1(68.072,100.076) ; R8.2 67.398,64.682 v1(68.58,63.5) ; 111.466,57.443 111.466,60.666 v1(112.268,61.468) ; 111.72,94.019 111.72,97.242 v1(112.522,98.044) ; R30.2 112.864,64.428 v1(114.046,63.246) ; R41.2 113.118,101.004 v1(114.3,99.822)
  Bottom Layer w0.3: v1(66.294,98.298) 66.802,98.298 68.072,99.568 v1(68.072,100.076) ; v1(66.802,61.722) 67.31,61.722 68.58,62.992 v1(68.58,63.5) ; v1(112.268,61.468) 112.776,61.468 114.046,62.738 v1(114.046,63.246) ; v1(112.522,98.044) 113.03,98.044 114.3,99.314 v1(114.3,99.822)
NETR9_2: R9.2 R20.2 R31.2 R42.2 | length 50.8
  Top Layer w0.3: 65.992,94.273 65.992,95.202 67.818,97.028 v1(67.818,97.282) ; 66.5,57.697 66.5,58.626 68.326,60.452 v1(68.326,60.706) ; v1(68.834,102.108) 69.684,101.258 R20.2 ; v1(69.342,65.532) 70.192,64.682 R9.2 ; 111.966,57.443 111.966,58.372 113.792,60.198 v1(113.792,60.452) ; 112.22,94.019 112.22,94.948 114.046,96.774 v1(114.046,97.028) ; v1(114.808,65.278) 115.658,64.428 R31.2 ; v1(115.062,101.854) 115.912,101.004 R42.2
  Bottom Layer w0.3: v1(67.818,97.282) 67.818,98.044 69.088,99.314 70.104,99.314 70.612,99.822 70.612,100.33 v1(68.834,102.108) ; v1(68.326,60.706) 68.326,61.468 69.596,62.738 70.612,62.738 71.12,63.246 71.12,63.754 v1(69.342,65.532) ; v1(113.792,60.452) 113.792,61.214 115.062,62.484 116.078,62.484 116.586,62.992 116.586,63.5 v1(114.808,65.278) ; v1(114.046,97.028) 114.046,97.79 115.316,99.06 116.332,99.06 116.84,99.568 116.84,100.076 v1(115.062,101.854)
NETR10_1: R10.1 R21.1 R32.1 R43.1 U1.2 U2.2 U3.2 U4.2 | length 33.2
  Top Layer w0.3: R21.1 57.206,96.322 v1(57.404,96.52) ; R10.1 57.714,59.746 v1(57.912,59.944) ; v1(59.69,94.996) 59.436,94.742 59.436,93.148 U2.2 ; v1(60.198,58.42) 59.944,58.166 59.944,56.572 U1.2 ; R32.1 103.18,59.492 v1(103.378,59.69) ; R43.1 103.434,96.068 v1(103.632,96.266) ; v1(105.664,58.166) 105.41,57.912 105.41,56.318 U3.2 ; v1(105.918,94.742) 105.664,94.488 105.664,92.894 U4.2
  Bottom Layer w0.3: v1(57.404,96.52) 57.912,96.52 59.436,94.996 v1(59.69,94.996) ; v1(57.912,59.944) 58.42,59.944 59.944,58.42 v1(60.198,58.42) ; v1(103.378,59.69) 103.886,59.69 105.41,58.166 v1(105.664,58.166) ; v1(103.632,96.266) 104.14,96.266 105.664,94.742 v1(105.918,94.742)
NETR10_2: R10.2 R21.2 R32.2 R43.2 U1.3 U2.3 U3.3 U4.3 | length 44
  Top Layer w0.3: v1(53.34,93.218) 53.836,92.722 R21.2 ; v1(53.848,56.642) 54.344,56.146 R10.2 ; v1(58.42,94.234) 58.42,92.964 58.736,92.648 U2.3 ; v1(58.928,57.658) 58.928,56.388 59.244,56.072 U1.3 ; v1(99.314,56.388) 99.81,55.892 R32.2 ; v1(99.568,92.964) 100.064,92.468 R43.2 ; v1(104.394,57.404) 104.394,56.134 104.71,55.818 U3.3 ; v1(104.648,93.98) 104.648,92.71 104.964,92.394 U4.3
  Bottom Layer w0.3: v1(53.34,93.218) 53.34,93.472 53.848,93.98 53.848,94.234 v1(58.42,94.234) ; v1(53.848,56.642) 53.848,56.896 54.356,57.404 54.356,57.658 v1(58.928,57.658) ; v1(99.314,56.388) 99.314,56.642 99.822,57.15 99.822,57.404 v1(104.394,57.404) ; v1(99.568,92.964) 99.568,93.218 100.076,93.726 100.076,93.98 v1(104.648,93.98)
NETR11_1: R11.1 R22.1 R33.1 R44.1 | length 28.9
  Top Layer w0.3: 65.492,87.522 65.492,86.106 67.818,86.106 69.088,84.836 R22.1 ; 66,50.946 66,49.53 68.326,49.53 69.596,48.26 R11.1 ; 111.466,50.692 111.466,49.276 113.792,49.276 115.062,48.006 R33.1 ; 111.72,87.268 111.72,85.852 114.046,85.852 115.316,84.582 R44.1
S$1305: 
S$6217: R6.2 R17.2 R28.2 R39.2 U1.9 U2.9 U3.9 U4.9 | length 25.5
  Top Layer w0.3: R17.2 56.134,86.106 59.676,89.648 U2.9 ; R6.2 56.642,49.53 60.184,53.072 U1.9 ; R28.2 102.108,49.276 105.65,52.818 U3.9 ; R39.2 102.362,85.852 105.904,89.394 U4.9
pads on no net: U1.1 U1.5 U1.7 U1.10 U1.24 U1.27 U1.28 U1.34 U1.35 U1.36 U1.49 U2.1 U2.5 U2.7 U2.10 U2.24 U2.27 U2.28 U2.34 U2.35 U2.36 U2.49 U3.1 U3.5 U3.7 U3.10 U3.24 U3.27 U3.28 U3.34 U3.35 U3.36 U3.49 U4.1 U4.5 U4.7 U4.10 U4.24 U4.27 U4.28 U4.34 U4.35 U4.36 U4.49

## Polygon pours and split planes (outlines as drawn)
GND on Bottom Layer (solid): 81.026,72.136 38.862,72.136 38.608,71.882 38.608,38.354 81.026,38.354 81.28,38.608
GND on Bottom Layer (solid): 80.518,108.712 38.354,108.712 38.1,108.458 38.1,74.93 80.518,74.93 80.772,75.184
GND on Bottom Layer (solid): 126.492,71.882 84.328,71.882 84.074,71.628 84.074,38.1 126.492,38.1 126.746,38.354
GND on Bottom Layer (solid): 126.746,108.458 84.582,108.458 84.328,108.204 84.328,74.676 126.746,74.676 127,74.93

## Silkscreen, mask and mechanical layers (free items; w line width, h text height)
Document:
  lines w0.254: 39.75,40.696 cw(c39.75,40.446) 40,40.446 79.5,40.446 ccw(c79.5,40.946) 80,40.946 80,68.196 ccw(c79.5,68.196) 79.5,68.696 40.25,68.696 ccw(c40.25,68.196) 39.75,68.196 39.75,40.696